# Altium PCB PD1_8.PcbDoc
Units mil, origin at the board's own origin, x right, y up, seen from the top; angles counter-clockwise.
Board outline 4000 x 4000 mil, 2 copper layers (Top Layer, Bottom Layer); 74 components, 40 nets, 286 pads, 58 vias.
Unrouted connection lines stored in the file: 2.
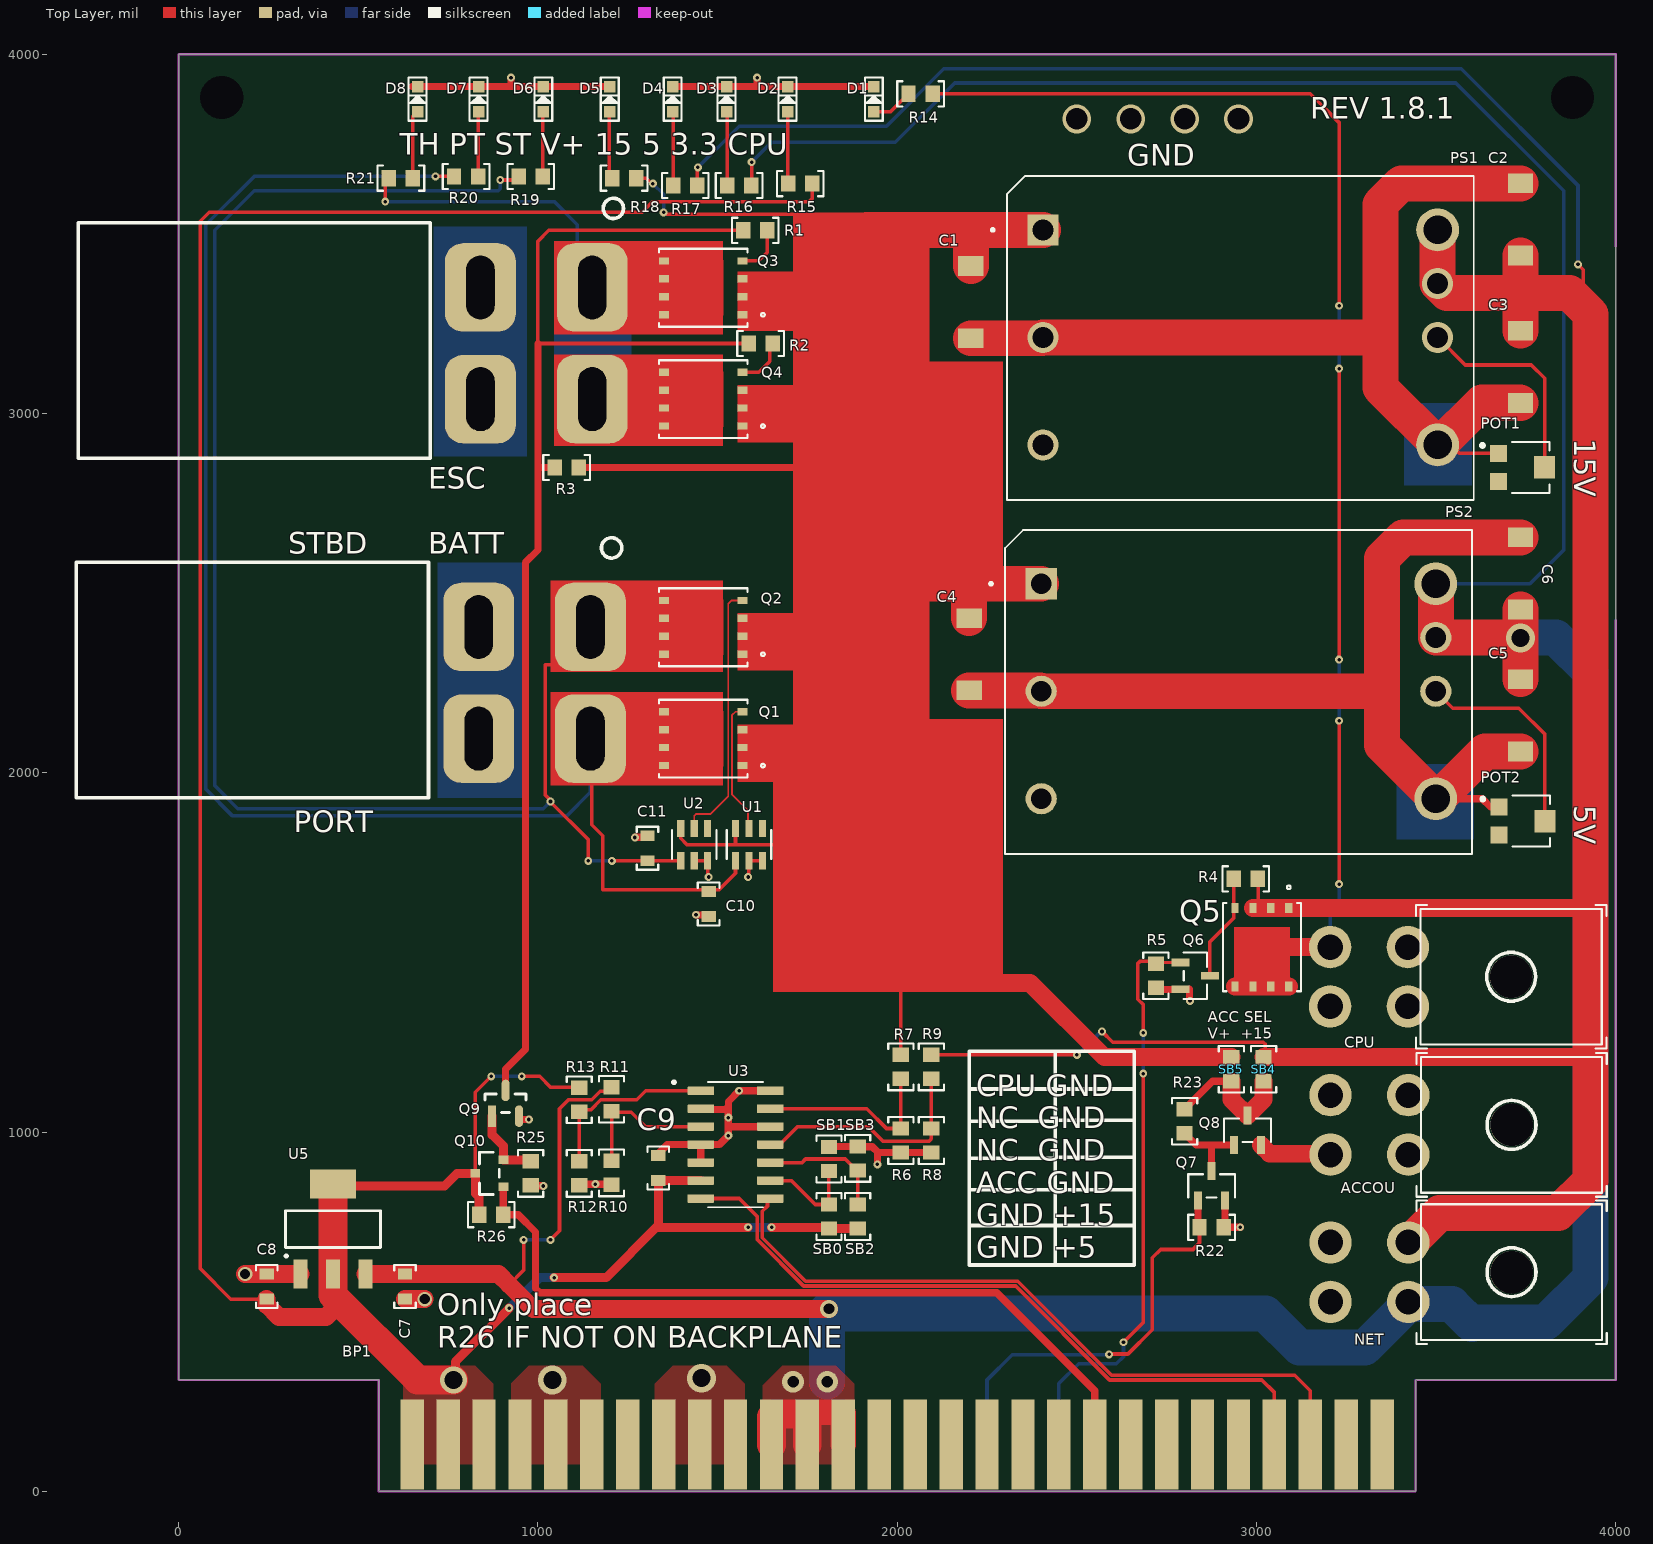
[diagram p0: Top Layer view]
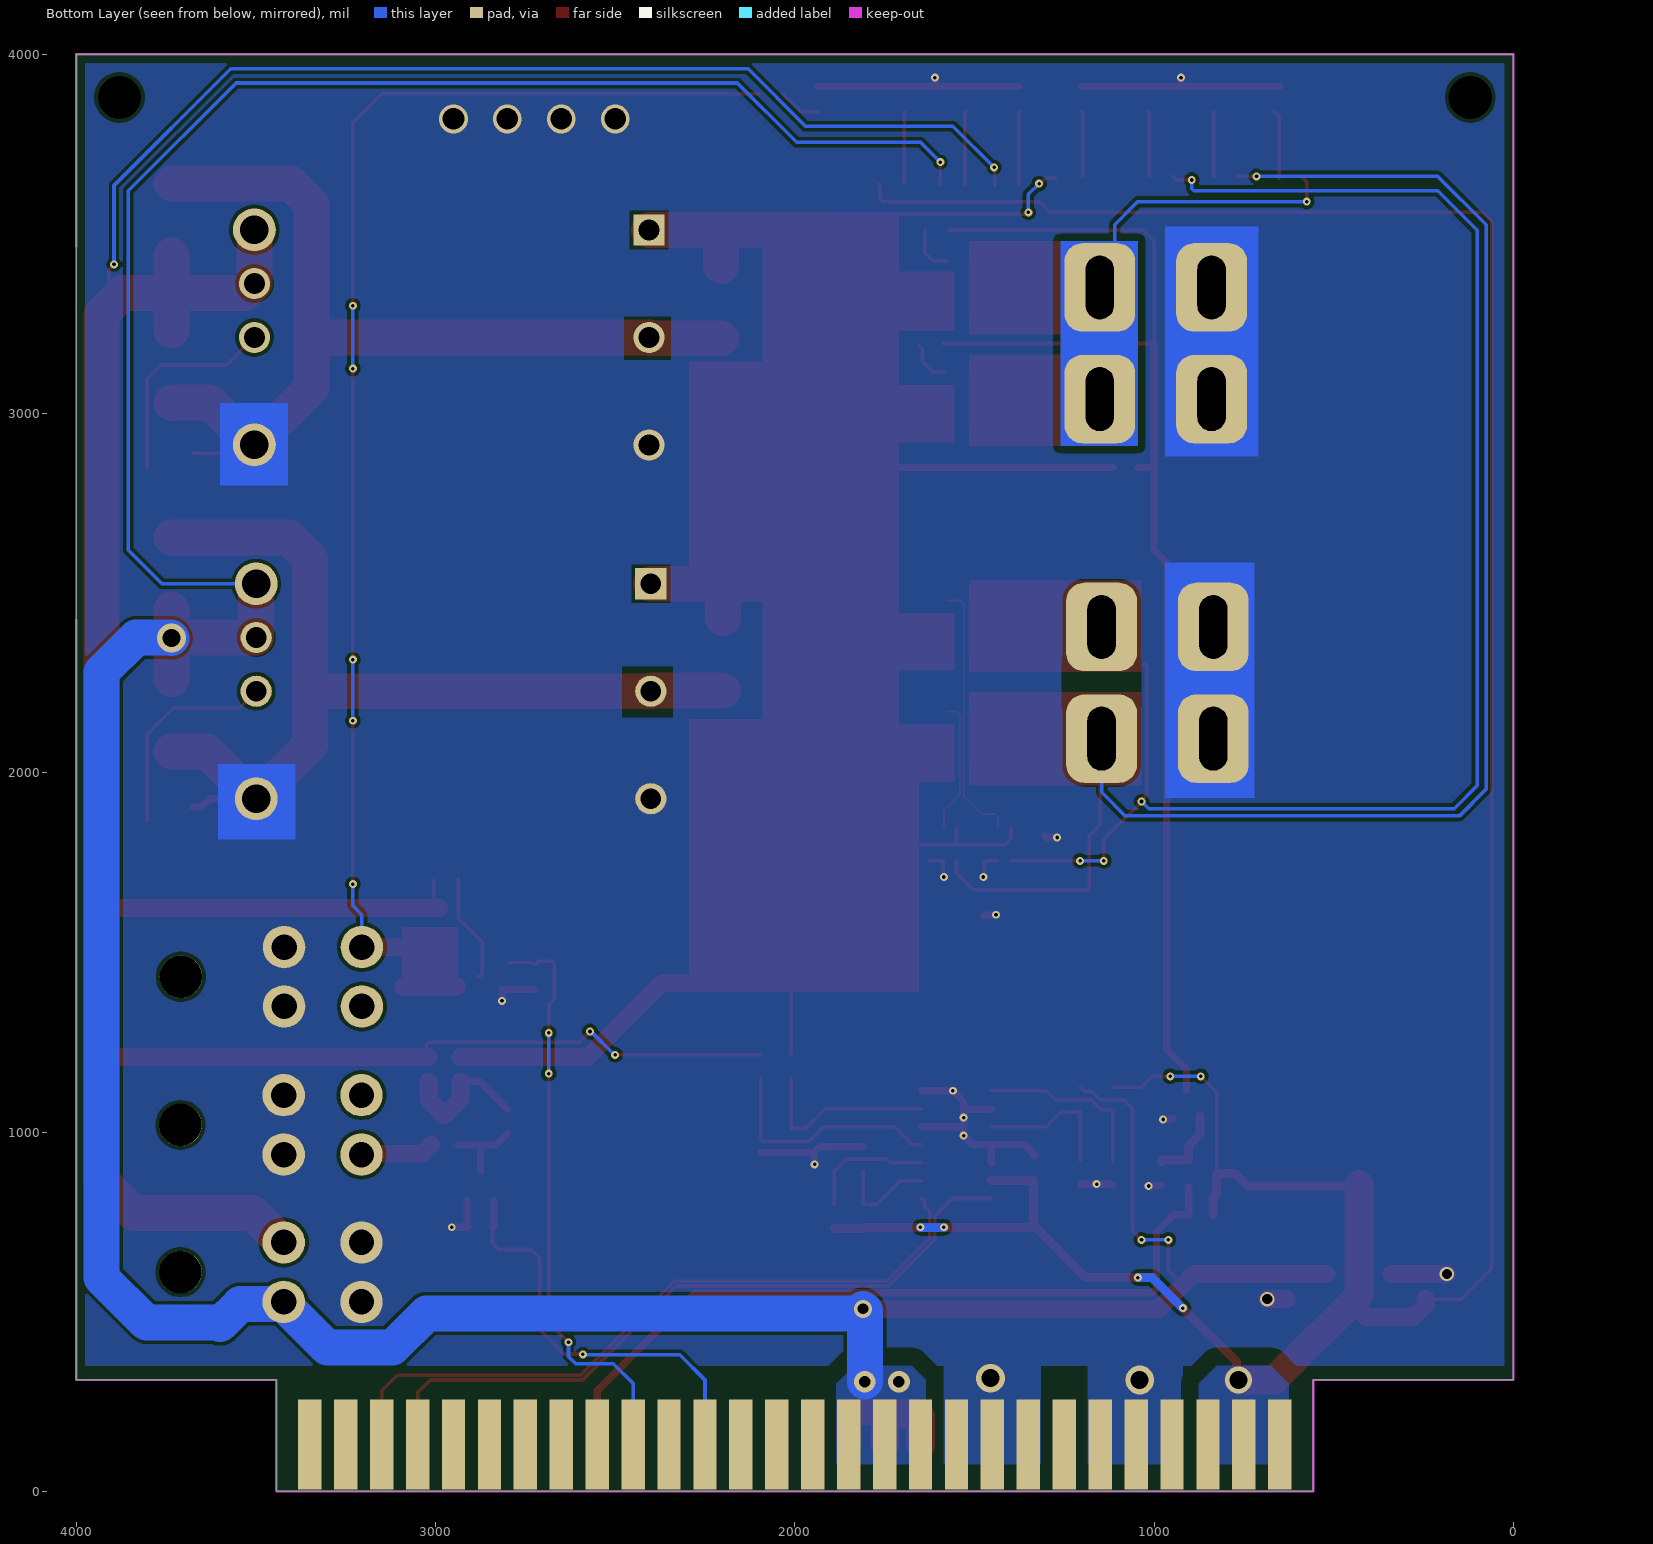
[diagram p1: Bottom Layer view, seen from below]
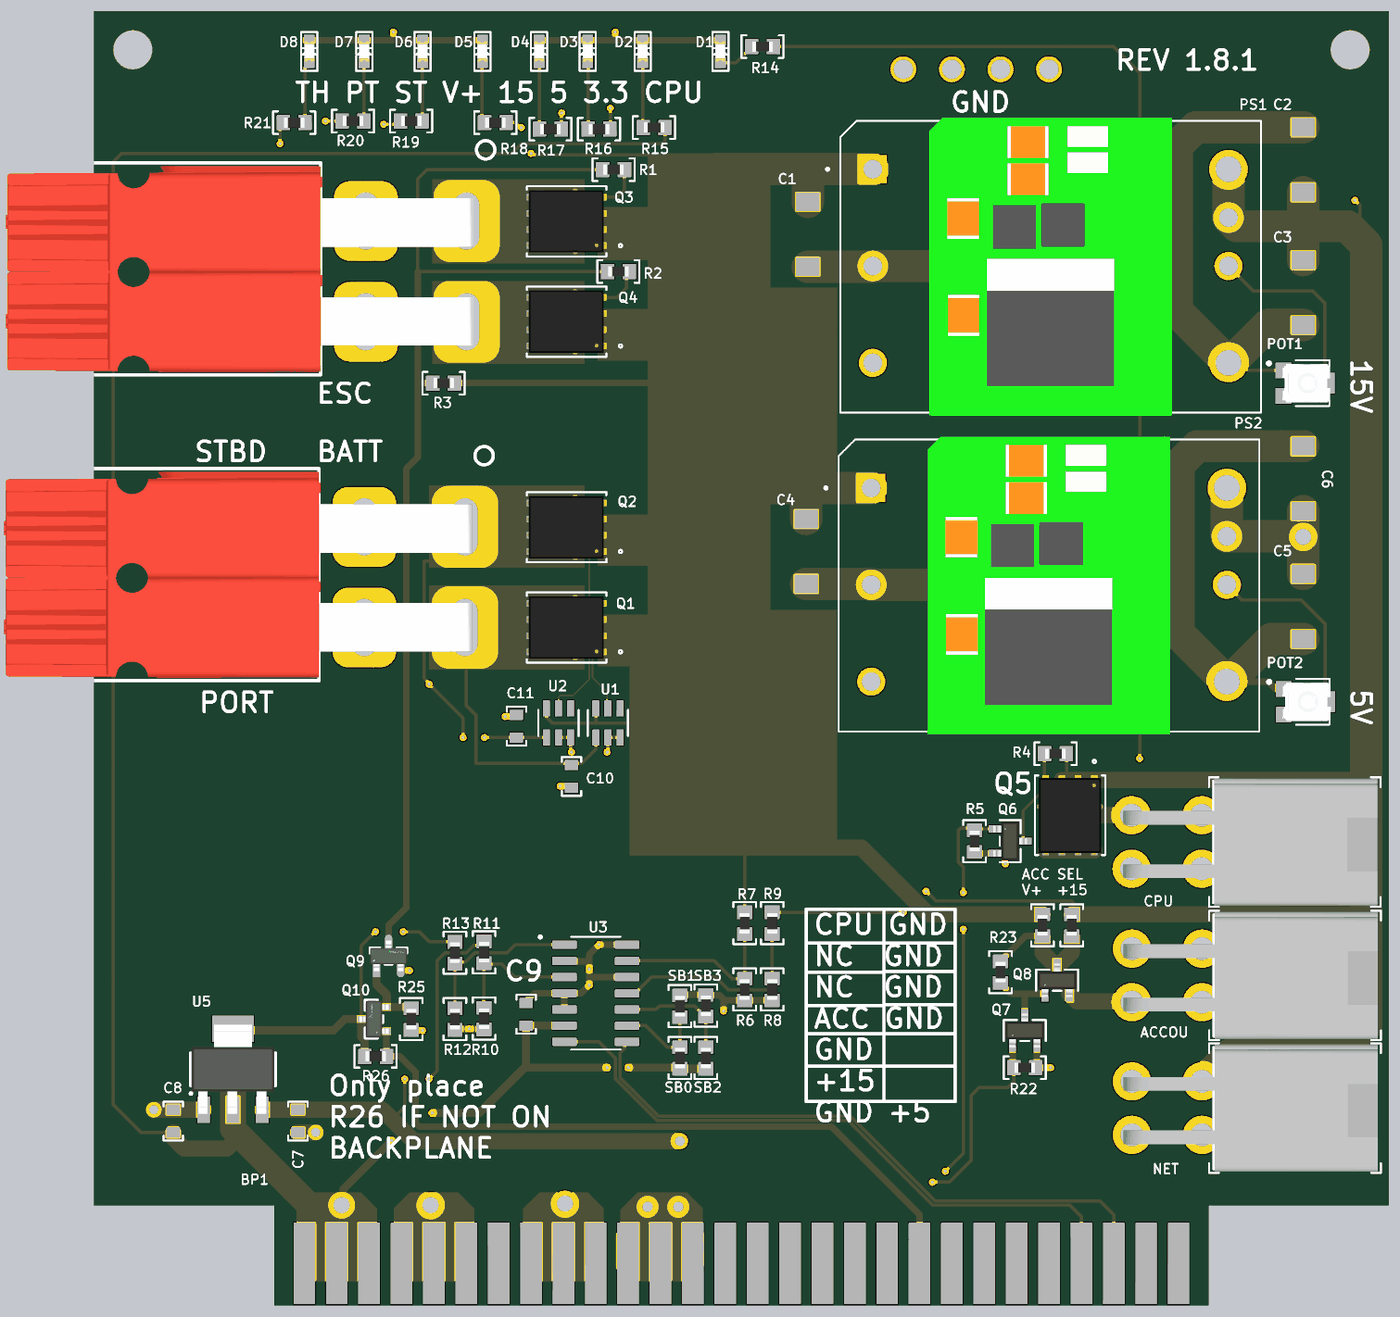
[diagram p2: 3D render of the assembled board from above, using the file's embedded part models]

## Layer stack, top to bottom
Top Solder: solder mask 0.4, Solder Resist, Dk 3.5
Top Layer: signal copper 2.7559
Dielectric 1: dielectric 12.6, FR-4, Dk 4.8
Bottom Layer: signal copper 2.7559
Bottom Solder: solder mask 0.4, Solder Resist, Dk 3.5

## Board outline
557,0 557,310 0,310 0,4000 4000,4000 4000,3465 4000,2425 4000,310 3443,310 3443,0

## Design rules (kind name [scope] priority, off if disabled: settings)
AcuteAngle [All] p1: minimum=8.75000000000000E+0001 checktracksonly=FALSE
BoardOutlineClearance [All] p1: gap=16 ignorepadtopadclearanceinfootprint=FALSE
Clearance [All] p1: gap=10 ignorepadtopadclearanceinfootprint=FALSE except(0: Arc-Region; 3.5: Arc-Arc Arc-Track Track-Track; 5: Arc-SMDPad Track-SMDPad SMDPad-SMDPad; 6: Arc-Text Track-Text SMDPad-THPad SMDPad-Via SMDPad-Text SMDPad-Hole THPad-Via THPad-Text THPad-Hole Via-Text Via-Hole Fill-Text Poly-Text Region-Text Text-Text Text-Hole; 12.99: Arc-THPad Track-THPad; 20: THPad-THPad Fill-Poly Fill-Region Poly-Region Region-Region; 50: Poly-Poly)
Clearance "Clearance Vplus" [InNet('GND') vs InNet('V+')] p2: gap=10 ignorepadtopadclearanceinfootprint=FALSE except(3.5: Arc-Arc Arc-Track Track-Track; 5: Arc-SMDPad Track-SMDPad SMDPad-SMDPad; 6: Arc-Text Track-Text SMDPad-THPad SMDPad-Via SMDPad-Text SMDPad-Hole THPad-Via THPad-Text THPad-Hole Via-Text Via-Hole Fill-Text Poly-Text Region-Text Text-Text Text-Hole; 12.99: Arc-THPad Track-THPad; 20: Arc-Fill Track-Fill SMDPad-Fill THPad-THPad THPad-Fill Via-Fill Fill-Fill; 50: Poly-Poly)
ComponentOrientations [All] p1: allowedrotations=32
DiffPairsRouting "USB 2.0" [InDifferentialPairClass('USB 2.0')] p1: maxlimit=4 minlimit=4 mostfreqgap=4 toplayer_minwidth=9 toplayer_maxwidth=9 toplayer_prefwidth=9 bottomlayer_minwidth=9 bottomlayer_maxwidth=9 bottomlayer_prefwidth=9 impedanceprofiledriven=TRUE maxuncoupledlength=500
DiffPairsRouting [All] p2: maxlimit=10 minlimit=10 mostfreqgap=10 toplayer_minwidth=15 toplayer_maxwidth=15 toplayer_prefwidth=15 bottomlayer_minwidth=15 bottomlayer_maxwidth=15 bottomlayer_prefwidth=15 maxuncoupledlength=500
FanoutControl Fanout_Default [All] p5: bgadir=Out bgaviamode=Centered fanoutstyle=Auto fanoutdirection=OutOnly viagrid=1 // Fanout_Default (Default Rule)
HoleSize "HoleSize JLCPCB" [All] p1: absolutevalues=TRUE maxlimit=245 minlimit=8 maxpercent=80.000 minpercent=20.000
HoleToHoleClearance "HoleToHoleClearance JLCPCB" [All] p1: gap=20 allowstackedmicrovias=TRUE
MinimumAnnularRing "MinimumAnnularRing JLCPCB" [All] p1: minimumring=6
MinimumSolderMaskSliver [All] p1 off: minsoldermaskwidth=10
PasteMaskExpansion [All] p1: expansion=1
PlaneClearance [InNet('GND')] p1: clearance=20
PolygonConnect EdgeConnect [(IsNamedPolygon('PolygonDirect'))] p1: connectstyle=Direct reliefconductorwidth=10 reliefentries=4 polygonreliefangle="90 Angle" airgapwidth=10
PolygonConnect [All] p2: thpad.connectstyle=Direct thpad.reliefconductorwidth=10 thpad.reliefentries=4 thpad.polygonreliefangle="90 Angle" thpad.airgapwidth=10 smdpad.connectstyle=Relief smdpad.reliefconductorwidth=10 smdpad.reliefentries=4 smdpad.polygonreliefangle="90 Angle" smdpad.airgapwidth=10 via.connectstyle=Direct via.reliefconductorwidth=10 via.reliefentries=4 via.polygonreliefangle="90 Angle" via.airgapwidth=10
RoutingVias "RoutingVias JLCPCB" [All] p1: holewidth=10 width=22 viastyle="Through Hole" minholewidth=8 minwidth=20 maxholewidth=28 maxwidth=40
SMDEntry [All] p1: side=TRUE corner=TRUE anyangle=TRUE
SMDToCorner [All] p1: distance=0
SMDToPlane [All] p1: distance=0
SilkToSilkClearance [All] p1: silktosilkclearance=1
SilkToSolderMaskClearance "SilkToSolderMaskClearance JLCPCB" [IsPad] p1: minsilkscreentomaskgap=6 clearancetoexposedcopper=TRUE
SolderMaskExpansion [All] p1: expansion=4 istentingtop=FALSE
UnRoutedNet [All] p1: checkbadconnections=TRUE
Width "Width JLCPCB 1oz" [All] p1: maxlimit=200 minlimit=5 preferedwidth=8 minimp=50.000000 maximp=50.000000 favimp=50.000000
20 further rules are at their usual default settings.

## Components (designator, comment, footprint, x,y, rotation, side; value= is the part's Value field where it differs from the comment)
ACCOU "4 POS R/A" "CONN_MOLEX_MINIFIT JR_4 POS_R/A" 3710,1020 r90 top
BATT "4 POS R/A" "CONN_ANDERSON_PP45_4 POS_R/A" 835,2406.02 r270 top
BP1 "Backplane Connector" BACKPLANE_EDGE_CONN 650,130 r0 top
C1 "100uF" CAPAE430X550N 2205,3310 r270 top
C2 ".1uF 50V" CAPAE430X550N 3735,3540.39 r90 top
C3 "22uF 50V" CAPAE430X550N 3735,3130 r270 top
C4 "100uF" CAPAE430X550N 2200,2330 r270 top
C5 ".1uF 50V" CAPAE430X550N 3735,2160 r270 top
C6 "22uF 50V" CAPAE430X550N 3735,2555 r90 top
C7 "10uF Ceramic 6.3V" CAPACITOR_0603 630,570 r270 top
C8 "47uF Ceramic 6.3V" CAPACITOR_0603 245,570 r90 top value=47uF
C9 "10uF Ceramic 6.3V" CAPACITOR_0603 1335,900 r90 top
C10 "10uF Ceramic 6.3V" CAPACITOR_0603 1475,1635 r270 top
C11 "10uF Ceramic 6.3V" CAPACITOR_0603 1305,1790 r90 top
CPU "4 POS R/A" "CONN_MOLEX_MINIFIT JR_4 POS_R/A" 3708.94,1432.32 r90 top
D1 "IN-S63AT5G" LED_0603 1935,3875 r90 top
D2 "IN-S63AT5G" LED_0603 1695,3875 r90 top
D3 "IN-S63AT5G" LED_0603 1525,3875 r90 top
D4 "IN-S63AT5G" LED_0603 1375,3875 r90 top
D5 "IN-S63AT5G" LED_0603 1200,3875 r90 top
D6 "IN-S63AT5G" LED_0603 1015,3875 r90 top
D7 "IN-S63AT5G" LED_0603 835,3875 r90 top
D8 "IN-S63AT5G" LED_0603 665,3875 r90 top
ESC "4 POS R/A" "CONN_ANDERSON_PP45_4 POS_R/A" 840,3351.02 r270 top
NET "4 POS R/A" "CONN_MOLEX_MINIFIT JR_4 POS_R/A" 3710,610 r90 top
POT1 "TC33X-2-203E" TRIM_TC33X-2-203E 3745,2850 r0 top
POT2 "TC33X-2-203E" TRIM_TC33X-2-203E 3745.87,1865.63 r0 top
PS1 "I6A4W020A033V-001-R" CONV_I6A4W020A033V-001-R 2955,3210 r0 top
PS2 "I6A4W020A033V-001-R" CONV_I6A4W020A033V-001-R 2950,2225 r0 top
Q1 "SIR167DP-T1-GE3" MOSFET_7DP-T1-GE3_VIS 1460,2095 r180 top
Q2 "SIR167DP-T1-GE3" MOSFET_7DP-T1-GE3_VIS 1460,2405 r180 top
Q3 "SIR167DP-T1-GE3" MOSFET_7DP-T1-GE3_VIS 1460,3350 r180 top
Q4 "SIR167DP-T1-GE3" MOSFET_7DP-T1-GE3_VIS 1460,3040 r180 top
Q5 "SIR167DP-T1-GE3" MOSFET_7DP-T1-GE3_VIS 3015,1515 r270 top
Q6 "PMV13XNEAR" SOT-23-3 2830,1435 r270 top
Q7 "MOSFET N-Ch 20V 7.3A TO-236AB" SOT-23-3 2875,850 r0 top
Q8 "MOSFET P-CHANNEL 20V 4.7A SOT23" SOT-23-3 2975,1005 r0 top
Q9 "BSS138" FP-318-08-IPC_B 910,1080 r90 top
Q10 "BSS84,215" FP-SOT23-MFG 865,885 r180 top
R1 "10k Ohm 5% 1/10W" RESISTOR_0603 1605,3510 r0 top
R2 "10k Ohm 5% 1/10W" RESISTOR_0603 1620,3195 r0 top
R3 "10k Ohm 5% 1/10W" RESISTOR_0603 1080,2850 r180 top
R4 "10k Ohm 5% 1/10W" RESISTOR_0603 2970,1705 r180 top
R5 "10k Ohm 5% 1/10W" RESISTOR_0603 2720,1435 r270 top
R6 "0 Ohm Jumper No Fit" RESISTOR_0603 2010,976.5 r270 top
R7 "0 Ohm Jumper No Fit" RESISTOR_0603 2010,1181.5 r90 top
R8 "0 Ohm Jumper No Fit" RESISTOR_0603 2095,976.5 r270 top
R9 "0 Ohm Jumper No Fit" RESISTOR_0603 2095,1181.5 r270 top
R10 "0 Ohm Jumper No Fit" RESISTOR_0603 1205,886.5 r270 top
R11 "0 Ohm Jumper No Fit" RESISTOR_0603 1205,1091.5 r90 top
R12 "0 Ohm Jumper No Fit" RESISTOR_0603 1115,885 r270 top
R13 "0 Ohm Jumper No Fit" RESISTOR_0603 1115,1090 r270 top
R14 "0 Ohm Jumper No Fit" RESISTOR_0603 2065,3890 r180 top
R15 "0 Ohm Jumper No Fit" RESISTOR_0603 1730,3640 r180 top
R16 "0 Ohm Jumper No Fit" RESISTOR_0603 1560,3635 r180 top
R17 "0 Ohm Jumper No Fit" RESISTOR_0603 1410,3635 r180 top
R18 "0 Ohm Jumper No Fit" RESISTOR_0603 1240,3655 r180 top
R19 "0 Ohm Jumper No Fit" RESISTOR_0603 980,3660 r0 top
R20 "0 Ohm Jumper No Fit" RESISTOR_0603 800,3660 r0 top
R21 "0 Ohm Jumper No Fit" RESISTOR_0603 618.5,3655 r0 top
R22 "10k Ohm 5% 1/10W" RESISTOR_0603 2875,735 r180 top
R23 "10k Ohm 5% 1/10W" RESISTOR_0603 2800,1030 r270 top
R25 "10k Ohm 5% 1/10W" RESISTOR_0603 980,885 r270 top
R26 "10k Ohm 5% 1/10W" RESISTOR_0603 870,770 r0 top
SB0 "0 Ohm Jumper No Fit" RESISTOR_0603 1810,765 r90 top
SB1 "0 Ohm Jumper No Fit" RESISTOR_0603 1810,925 r90 top
SB2 "0 Ohm Jumper No Fit" RESISTOR_0603 1890,765 r90 top
SB3 "0 Ohm Jumper No Fit" RESISTOR_0603 1890,926.5 r90 top
SB4 "0 Ohm Jumper No Fit" RESISTOR_0603 3020,1175 r270 top
SB5 "0 Ohm Jumper No Fit" RESISTOR_0603 2930,1175 r270 top
U1 "LTC4412ES6TRPBF" TSOT-23_S6 1587.4,1800 r90 top
U2 "LTC4412ES6TRPBF" TSOT-23_S6 1435,1800 r90 top
U3 "MCP3428-E/SL" SOIC127P600X175-14N 1550,965 r0 top
U5 "LM1117IMPX-3.3/NOPB" SOT-223-4 429.45,730 r90 top

## Footprints (in the part's own frame and the unit in brackets; to place one, negate y for a bottom-side part, rotate by r counter-clockwise, add the part's x,y. Pads: shape width x height; smd on the part's side, far side on the other; paste and mask are expansions set on the pad)
BACKPLANE_EDGE_CONN [mil]
  rect 65x250 smd far side: 1(0,0) 2(100,0) 3(200,0) 4(300,0) 5(400,0) 6(500,0) 7(600,0) 8(700,0) 9(800,0) 10(900,0) 11(1000,0) 12(1100,0) 13(1200,0) 14(1300,0) 15(1400,0) 16(1500,0) 17(1600,0) 18(1700,0) 19(1800,0) 20(1900,0) 21(2000,0) 22(2100,0) 23(2200,0) 24(2300,0) 25(2400,0) 26(2500,0) 27(2600,0) 28(2700,0)
  rect 65x250 smd: 29(2700,0) 30(2600,0) 31(2500,0) 32(2400,0) 33(2300,0) 34(2200,0) 35(2100,0) 36(2000,0) 37(1900,0) 38(1800,0) 39(1700,0) 40(1600,0) 41(1500,0) 42(1400,0) 43(1300,0) 44(1200,0) 45(1100,0) 46(1000,0) 47(900,0) 48(800,0) 49(700,0) 50(600,0) 51(500,0) 52(400,0) 53(300,0) 54(200,0) 55(100,0) 56(0,0)
CAPACITOR_0603 [mil] "CAPACITOR 0603"
  rect 30x40 smd: 1(-35,0) 2(35,0)
  silkscreen extent -60,-30 60,30, body extent -31,-16 31,16, height 31
CAPAE430X550N [mm]
  rect 1.4x1.8 smd: 1(-2.55,0) 2(2.55,0)
"CONN_ANDERSON_PP45_4 POS_R/A" [mm] "Anderson Powerpole45 2x2 Red/Black"
  rrect50% 6.25x5 hole 2 slot 4.5 at 0 deg: 1(0,7.9) 2(7.9,7.9) 3(0,0) 4(7.9,0)
  silkscreen extent -6.31,-28.45 12.07,10.12, body extent -4.32,-28.26 11.84,8.45, height 16.17
"CONN_MOLEX_MINIFIT JR_4 POS_R/A" [mm] "Molex Minifit Jr 5569 4 Pos R/A"
  round 3 hole 1.8: 1(2.1,7.3) 2(-2.1,7.3) 3(2.1,12.8) 4(-2.1,12.8)
  round 3 hole 3 unplated mask+0: ""(0,0)
  silkscreen extent -5.08,-6.73 5.08,6.73, body extent -5,-6.48 5,13.46, height 11.4
CONV_I6A4W020A033V-001-R [mm]
  rect 2.205x2.205 hole 1.47: 1(-13.95,7.65)
  round 2.205 hole 1.47: 2(-13.95,0.05) 3(-13.95,-7.55) 6(13.95,0.05) 7(13.95,3.85)
  round 3.03 hole 2.02: 4(13.95,-7.55) 8(13.95,7.65)
  silkscreen extent -17.6,-11.45 16.5,11.45, body extent -9.53,-11.68 9.53,11.68, height 9.65
FP-318-08-IPC_B [mm]
  rect 1.524x0.578 smd paste+0 mask+0: 1(-0.91,0.95)
  rrect100% 1.524x0.578 smd paste+0 mask+0: 2(-0.91,-0.95) 3(0.91,0)
  silkscreen extent -0.65,-1.45 0.65,1.45, body extent -1.92,-1.7 1.92,1.7, height 0.25
FP-SOT23-MFG [mm]
  rect 0.7x0.6 smd paste-1000 mask+0: 1(-1,0.95) 2(-1,-0.95) 3(1,0)
  silkscreen extent -0.7,-1.5 0.7,1.5, body extent -1.5,-1.65 1.5,1.65, height 0.25
LED_0603 [mil] "LED 0603"
  rect 32x32 smd: 1(-35,0) 2(35,0)
  silkscreen extent -60,-25 60,25, body extent -31,-16 32,16, height 28
MOSFET_7DP-T1-GE3_VIS [mil]
  rect 28x20 smd paste-10 mask+0: 1(-109.25,75) 2(-109.25,25) 3(-109.25,-25) 4(-109.25,-75) 5(109.25,-75) 6(109.25,-25) 7(109.25,25) 8(109.25,75)
  Top Layer region: 95.25,77 -55.75,77 -55.75,-77 95.25,-77 95.25,-85 123.25,-85 123.25,-65 95.25,-65 95.25,-35 123.25,-35 123.25,-15 95.25,-15 95.25,15 123.25,15 123.25,35 95.25,35 95.25,65 123.25,65 123.25,85 95.25,85
  Top Layer region: 0,-77 0,-77 0,-77 0,-77 0,-77 0,-77 0,-77 0,-77
  Top Layer region: 0,77 0,77 0,77 0,77 0,77 0,77 0,77 0,77
  silkscreen extent -171,-109 123,109, body extent -120,-101 122,101, height 41
RESISTOR_0603 [mil] "Resistor 0603"
  rect 40x45 smd: 1(-33.5,0) 2(33.5,0)
  silkscreen extent -65,-35 65,35, body extent -31,-16 32,16, height 16
SOIC127P600X175-14N [mm]
  rrect25% 1.9x0.6 smd: 1(-2.455,3.81) 2(-2.455,2.54) 3(-2.455,1.27) 4(-2.455,0) 5(-2.455,-1.27) 6(-2.455,-2.54) 7(-2.455,-3.81) 8(2.455,-3.81) 9(2.455,-2.54) 10(2.455,-1.27) 11(2.455,0) 12(2.455,1.27) 13(2.455,2.54) 14(2.455,3.81)
  silkscreen extent -4.45,-4.43 1.95,4.51
SOT-23-3 [mil]
  rect 22x50 smd paste+0 mask+4: 1(-37.5,-41) 2(37.5,-41) 3(0,41)
  silkscreen extent -65,-33 65,33, body extent -60,-52 60,52, height 44
SOT-223-4 [mm]
  rect 2.05x1 smd paste+0 mask+0.102: 1(-3.175,2.3) 2(-3.175,0) 3(-3.175,-2.3)
  rect 2.05x3.25 smd paste+0 mask+0.102: 4(3.175,0)
  silkscreen extent -1.96,-3.35 1.3,3.35, body extent -3.5,-3.25 3.5,3.25, height 1.68
TRIM_TC33X-2-203E [mm]
  rect 1.2x1.2 smd: 1(-1.8,1) 3(-1.8,-1)
  rect 1.5x1.6 smd: 2(1.45,0)
  silkscreen extent -3.07,-1.8 1.8,1.8, body extent -1.9,-1.5 1.9,1.5, height 1.1
TSOT-23_S6 [mil]
  rect 48x20 smd: 1(-45,37.4) 2(-45,0) 3(-45,-37.4) 4(45,-37.4) 5(45,0) 6(45,37.4)
  silkscreen extent -40,-62 40,62

## Part data
ACCOU CPU NET: library part "CONN_MOLEX_MINIFIT JR_4POS_R/A", "Molex Minifit Jr. 5569  / 4 Pos R/A Natural", Color=Natural, Current Per Pin=13A, Manufacturer=Molex, Supplier Part Number 1=WM13112-ND, ComponentLink1Description=Datasheet, ComponentLink1URL=https://www.molex.com/pdm_docs/sd/026013115_sd.pdf, Configuration="Right Angle", Created by="Flip B", Number of Positions=4, Pitch=4.2mm, Series="Minifit Jr 5569", Supplier 1=Digi-Key
BATT ESC: library part CONN_ANDERSON_2x2_R/A, "Anderson PP45 / 4 Pos R/A Red/Black", Color=Red/Black, Current Per Pin=45A, Manufacturer=Anderson, Supplier Part Number 1=2243-1337G1-ND, ComponentLink1Description=Datasheet, ComponentLink1URL=https://www.andersonpower.com/content/dam/app/ecommerce/product-pdfs/DS-PP1545.pdf, Configuration="Right Angle", Created by="Flip B", Number of Positions=4, Pitch=7.9mm, Series="PowerPole 45", Supplier 1=Digi-Key, Supplier 2=Digi-Key, Supplier 3=Digi-Key, Supplier 4=Digi-Key, Supplier Part Number 2=2243-1336G1-ND, Supplier Part Number 3=2243-1327-BK-ND, Supplier Part Number 4=A102007-ND
BP1: library part BACKPLANE_EDGE_CONN, "Titan Backplane Edge Connector"
C1 C2 C3 C4 C5 C6: library part 865250340002, "4.7ÂµF 16V Aluminum Electrolytic Capacitors Radial, Can - SMD 2000 Hrs @ 85Â°C", Package=None, Availability=Warning, Check_prices=https://www.snapeda.com/parts/865250340002/W%C3%BCrth%20Elektronik/view-part/5002976/?ref=eda, MF="Wurth Elektronik", MP=865250340002, Price=None, Purchase-URL=https://pricing.snapeda.com/search/part/865250340002/?ref=eda, SnapEDA_Link=https://www.snapeda.com/parts/865250340002/W%C3%BCrth%20Elektronik/view-part/5002976/?ref=snap
C7 C9 C10 C11: library part CAPACITOR_10uF_0603, "Cap 10uF 6.3V +/-20% / Ceramic 0603", Supplier Part Number 1=1276-1119-1-ND, Tolerance="+/- 20%", Value (uF)=10uF, Voltage=6.3V, ComponentLink1Description=Digikey, ComponentLink1URL=https://www.digikey.com/en/products/detail/samsung-electro-mechanics/CL10A106MQ8NNNC/3886777, Made By="Flip B", Supplier 1=Digi-Key
C8: library part CAPACITOR_47uF_0603, "Cap 47uF 6.3V +/-20% / Ceramic 0603", Supplier Part Number 1=490-13247-1-ND, Tolerance="+/- 20%", Voltage=6.3V, ComponentLink1Description=Datsheet, ComponentLink1URL=https://www.mouser.com/datasheet/2/212/KEM_C1002_X7R_SMD-1102033.pdf, Made By="Flip B", Supplier 1=Digi-Key
D1 D2 D3 D4 D5 D6 D7 D8: library part LED_Green_0603_3V, "LED Green Vf= 3V If = 0.005A / IN-S63AT5G", Color=Green, Forward Current=5mA, Forward Voltage=3V, Package=0603, Supplier Part Number 1=1830-1062-1-ND, ComponentLink1Description=Datasheet, ComponentLink1URL=https://www.we-online.de/katalog/datasheet/150060GS75000.pdf, Made By="Robert Pafford", Supplier 1=Digi-Key
POT1 POT2: "20 kOhms 0.1W, 1/10W J Lead Surface Mount Trimmer Potentiometer Cermet 1 Turn Top Adjustment", Package="1608 Bourns", Check_prices=https://www.snapeda.com/parts/TC33X-2-203E/Bourns/view-part/312812/?ref=eda, Digi-Key_Part_Number=TC33X-2-203ECT-ND, MF=Bourns, MP=TC33X-2-203E, Purchase-URL=https://pricing.snapeda.com/search/part/TC33X-2-203E/?ref=eda, SnapEDA_Link=https://www.snapeda.com/parts/TC33X-2-203E/Bourns/view-part/312812/?ref=snap
PS1 PS2: "Non-Isolated PoL Module DC DC Converter 1 Output 3.3 ~ 15V 20A 9V - 53V Input", Package="DIP-8 TDK-Lambda", Availability="In Stock", Check_prices=https://www.snapeda.com/parts/I6A4W020A033V-001-R/TDK-Lambda%20Americas%20Inc./view-part/1737324/?ref=eda, MF="TDK-Lambda Americas", MP=I6A4W020A033V-001-R, Price=None, Purchase-URL=https://pricing.snapeda.com/search/part/I6A4W020A033V-001-R/?ref=eda, SnapEDA_Link=https://www.snapeda.com/parts/I6A4W020A033V-001-R/TDK-Lambda%20Americas%20Inc./view-part/1737324/?ref=snap
Q1 Q2 Q3 Q4 Q5: "P-Channel 30 V 60A (Tc) 65.8W (Tc) Surface Mount PowerPAK® SO-8", Mfr_Name=Vishay, Copyright="Copyright (C) 2022 Ultra Librarian. All rights reserved.", Manufacturer_Part_Number=SIR167DP-T1-GE3, RefDes=RefDes, Type=DEV
Q6: "N-Channel 20 V 7.3A (Ta) 610mW (Ta), 8.3W (Tc) Surface Mount TO-236AB", Amp Rating="7.3 A", Package=SOT23-3L, Power Dissipation="610mW (Ta), 8.3W (Tc)", Supplier Part Number 1=771-PMV13XNEAR, Created by="Dylan T", FET Type=N-Channel, Manufacturer _Part_Number=PMV13XNEAR, Rds (on)="15mOhm @ 7.3A, 8V", SourceLibrary=ON_Semiconductor_2020-01-13, Supplier 1=Mouser, Vdss="20 V", Vendor="Nexperia USA Inc.", Vgs (Max)="+/- 12 V", Vgs (th)="1.3V @ 250uA"
Q7: library part PMV13XNEAR, "N-Channel 20 V 7.3A (Ta) 610mW (Ta), 8.3W (Tc) Surface Mount TO-236AB", Amp Rating="7.3 A", Package=SOT23-3L, Power Dissipation="610mW (Ta), 8.3W (Tc)", Supplier Part Number 1=771-PMV13XNEAR, Created by="Dylan T", FET Type=N-Channel, Manufacturer _Part_Number=PMV13XNEAR, Rds (on)="15mOhm @ 7.3A, 8V", SourceLibrary=ON_Semiconductor_2020-01-13, Supplier 1=Mouser, Vdss="20 V", Vendor="Nexperia USA Inc.", Vgs (Max)="+/- 12 V", Vgs (th)="1.3V @ 250uA"
Q8: library part TSM500P02CX, "P-Channel 20 V 4.7A (Tc) 1.56W (Tc) Surface Mount SOT-23", Amp Rating="4.7 A", Package="TO-236-3, SC-59, SOT-23-3", Power Dissipation="1.56W (Tc)", Supplier Part Number 1=TSM500P02CXRFGCT-ND, Created by="Robert Pafford", FET Type=P-Channel, Manufacturer_Part_Number=TSM500P02CX, Rds (on)="50mOhm @ 3A, 4.5V", Supplier 1=Digi-Key, Vdss="20 V", Vendor="Taiwan Semiconductor Corporation", Vgs (Max)=±10V, Vgs (th)="800mV @ 250µA"
Q9: library part CMP-07173-000101-1, "MOSFET N-CH 50V 220MA SOT-23", Case/Package=SOT-23, Continuous Drain Current (ID)=220mA, Drain to Source Breakdown Voltage=50V, Drain to Source Resistance=3.5R, Gate to Source Voltage (Vgs)=20V, Input Capacitance=27pF, Max Operating Temperature=150°C, Max Power Dissipation=360mW, Min Operating Temperature=-55°C, On-State Resistance=6R, Package Quantity=1, Threshold Voltage=1.3V, Contact Plating=Tin, Current Rating=220mA, Drain to Source Voltage (Vdss)=50V, Dual Supply Voltage=50V, Element Configuration=Single, Fall Time=9ns, Height=0.93mm, Lead Free="Lead Free", Length=2.92mm, Mount="Surface Mount", Nominal Vgs=1.3V, Number of Elements=1, Number of Pins=3, Packaging="Tape and Reel", Power Dissipation=360mW, Radiation Hardening=No, Rds On Max=3.5R, REACH SVHC="No SVHC", Rise Time=9ns, Termination=SMD/SMT, Turn-Off Delay Time=20ns, Turn-On Delay Time=2.5ns, Voltage Rating (DC)=50V, Weight=0.03g, Width=1.3mm
Q10: library part CMP-14409-000006-1, "MOSFET P-CH 50V 130MA SOT-23", Continuous Drain Current=-130mA, Drain to Source Breakdown Voltage=-50V, Drain to Source Resistance=6Ω, Gate To Source Voltage=20V, Input Capacitace At Vds="25pF @ -25V", Manufacturer="Nexperia USA Inc.", Max Junction Temp=+150°C, Package=SOT23, Power Dissipation=250mW, Temperature="-65°C to +150°C", Temperature Range Low=-65°C, Automotive=No, Category=Trans, ComponentLink2Description=Datasheet, ComponentLink2URL=https://assets.nexperia.com/documents/data-sheet/BSS84.pdf, Depletion Mode=False, Device Class L1="Discrete Semiconductors", Device Class L2=Transistors, Device Class L3=MOSFETs, Digikey Description="MOSFET P-CH 50V 130MA SOT-23", Drain To Source Voltage=-50V, Footprint Url=https://assets.nexperia.com/documents/outline-drawing/SOT23.pdf, Height=1.1mm, Ipc Land Pattern Name=SOT95P230X100-3, Lead Free=Yes, Manufacturer Part Number=BSS84,215, Number Of Channels=1, Number Of P Channels=1, Octopart=https://octopart.com/bss84%2C215-nexperia-78739375, RoHS=TRUE, Rthja Max=500K/W, Temperature Range High=+150°C, Threshold Vgs Max=-2V, Threshold Vgs Min=-0.8V, Turn Off Delay Time=7ns, Turn On Delay Time=3ns
R1 R2 R3 R4 R5 R22 R23 R25 R26: library part RESISTOR_10K_0603, "RES 10k OHM 5% 1/10W 0603", Digikey Part Numer=CR0603-JW-104ELFTR-ND, Supplier Part Number 1=2019-RK73B1JTTD103JCT-ND, Tolerance="+/- 5%", Value  (Ohms)=10K, ComponentLink1Description=Datasheet, ComponentLink1URL=https://www.bourns.com/docs/product-datasheets/CRxxxxx.pdf, Made By="Robert Pafford", Supplier=Digikey, Supplier 1=Digi-Key, Wattage=1/8W
R6 R8 R10 R12: library part JUMPER_0_0603, "0 Ohm Jumper No Fit for Solder Bridge", Value  (Ohms)=10k, ComponentLink1Description=Digikey, ComponentLink1URL=https://www.digikey.com/en/products/detail/koa-speer-electronics-inc/RK73B1JTTD101J/9844701, Made By="Robert Pafford"
R7: library part JUMPER_0_0603, "0 Ohm Jumper No Fit for Solder Bridge", Value  (Ohms)=55k, ComponentLink1Description=Digikey, ComponentLink1URL=https://www.digikey.com/en/products/detail/koa-speer-electronics-inc/RK73B1JTTD101J/9844701, Made By="Robert Pafford"
R9: library part JUMPER_0_0603, "0 Ohm Jumper No Fit for Solder Bridge", Value  (Ohms)=36k, ComponentLink1Description=Digikey, ComponentLink1URL=https://www.digikey.com/en/products/detail/koa-speer-electronics-inc/RK73B1JTTD101J/9844701, Made By="Robert Pafford"
R11: library part JUMPER_0_0603, "0 Ohm Jumper No Fit for Solder Bridge", Value  (Ohms)=5k, ComponentLink1Description=Digikey, ComponentLink1URL=https://www.digikey.com/en/products/detail/koa-speer-electronics-inc/RK73B1JTTD101J/9844701, Made By="Robert Pafford"
R13 SB0 SB1 SB2 SB3 SB4 SB5: library part JUMPER_0_0603, "0 Ohm Jumper No Fit for Solder Bridge", Value  (Ohms)=0, ComponentLink1Description=Digikey, ComponentLink1URL=https://www.digikey.com/en/products/detail/koa-speer-electronics-inc/RK73B1JTTD101J/9844701, Made By="Robert Pafford"
R14 R17: library part JUMPER_0_0603, "0 Ohm Jumper No Fit for Solder Bridge", Value  (Ohms)=2.2k, ComponentLink1Description=Digikey, ComponentLink1URL=https://www.digikey.com/en/products/detail/koa-speer-electronics-inc/RK73B1JTTD101J/9844701, Made By="Robert Pafford"
R15: library part JUMPER_0_0603, "0 Ohm Jumper No Fit for Solder Bridge", Value  (Ohms)=60, ComponentLink1Description=Digikey, ComponentLink1URL=https://www.digikey.com/en/products/detail/koa-speer-electronics-inc/RK73B1JTTD101J/9844701, Made By="Robert Pafford"
R16: library part JUMPER_0_0603, "0 Ohm Jumper No Fit for Solder Bridge", Value  (Ohms)=400, ComponentLink1Description=Digikey, ComponentLink1URL=https://www.digikey.com/en/products/detail/koa-speer-electronics-inc/RK73B1JTTD101J/9844701, Made By="Robert Pafford"
R18 R19 R20 R21: library part JUMPER_0_0603, "0 Ohm Jumper No Fit for Solder Bridge", Value  (Ohms)=3.6k, ComponentLink1Description=Digikey, ComponentLink1URL=https://www.digikey.com/en/products/detail/koa-speer-electronics-inc/RK73B1JTTD101J/9844701, Made By="Robert Pafford"
U1 U2: "OR Controller Source Selector Switch P-Channel 2:1 TSOT-23-6", Package="SOT-23-6 Analog Devices", Arrow_Europe-Purchase-URL=https://snapeda.com/shop?store=Arrow+Europe&id=4343773, Availability=Good, DigiKey-Purchase-URL=https://snapeda.com/shop?store=DigiKey&id=4343773, MF="Analog Devices", Mouser-Purchase-URL=https://snapeda.com/shop?store=Mouser&id=4343773, MP=LTC4412ES6#TRPBF, Price=None, SnapEDA_Link=https://www.snapeda.com/parts/LTC4412ES6%23TRPBF/Analog%20Devices/view-part/4343773/?ref=snap
U3: "16 Bit Analog to Digital Converter 4 Input 1 Sigma-Delta 14-SOIC", Package="SOIC-14 Microchip", Availability=Unavailable, MF=Microchip, MP=MCP3428-E/SL, Price=None, SnapEDA_Link=https://www.snapeda.com/parts/MCP3428-E/SL/Microchip/view-part/13249/?ref=snap
U5: "IC REG LIN 3.3V 800MA SOT223-4", Manufacturer="Texas Instruments", Package=SOT-223-4, PartNumber=LM1117IMP-3.3/NOPB, Supplier Part Number 1=LM1117IMPX-3.3/NOPBCT-ND, Amp Out=800mA, Created by="Dylan T", Supplier 1=Digi-Key, Vin (Max)=15V, Vout (Min/Fixed)=3.3V

## Free pads (board coordinates)
  round 60 hole 120: 1(120,3880) 1(3880,3880)

## Via types
v1: diameter 22, hole 10, Top Layer to Bottom Layer, 45 vias
v2: diameter 80, hole 60, Top Layer to Bottom Layer, 4 vias
v3: diameter 80, hole 50, Top Layer to Bottom Layer, 3 vias
v4: diameter 40, hole 28, Top Layer to Bottom Layer, 2 vias
v5: diameter 60, hole 32, Top Layer to Bottom Layer, 2 vias
v6: diameter 50, hole 30, Top Layer to Bottom Layer, 1 vias
v7: diameter 75, hole 50, Top Layer to Bottom Layer, 1 vias

## Nets (pads, with @x,y where several pads share a name; then routed paths per layer and width w, separated by ;. In a path a pad name is that pad's centre, name@x,y a point inside that pad or via, vN(x,y) a via of type N, cw(c..) or ccw(c..) an arc to the next point about the centre after c; other vN are vias at no path point)
3V3: BP1.1 BP1.2 BP1.3 BP1.54 BP1.55 BP1.56 C8.1 C9.1 Q10.3 R13.1 R15.1 R26.1 SB0.1 SB2.1 U3.6 U5.2 U5.4 | length 8558.5
  Top Layer w10: C8.1 145,535 60,620 60,1125 60,3535 85,3560 1290,3560 1320,3590 1755,3590 1763.5,3598.5 R15.1 ; Q10.3 825.63,1110.63 v1(870,1155) ; v1(955,1155) 1005,1155 1035,1125 1113.5,1125 R13.1
  Top Layer w25: U5.4 434.45,850 740,850 775,885 Q10.3 825.63,829.37 836.5,818.5 R26.1 ; v7(765,310) 770.53,315.53 770.53,360.53 v1(919.97,509.97) ; v1(1045,595) 1190,595 1330,735 ; U3.6 C9.1 1335,740 1330,735 ; v1(1585,735) 1330,735 ; v1(1650.5,735) 1806.5,735 SB0.1 SB2.1
  Top Layer w50: C8.1 245,519.29 279.29,485 410,485 450,525
  Top Layer w80: U5.4 U5.2 429.45,545.55 665,310 v7(765,310)
  Bottom Layer w10: v1(870,1155) v1(955,1155)
  Bottom Layer w25: v1(919.97,509.97) 1005,595 v1(1045,595) ; v1(1585,735) v1(1650.5,735)
+5: BP1.11 BP1.12 BP1.13 BP1.44 BP1.45 BP1.46 C5.1 C6.1 C7.1 NET.2 PS2.7 PS2.8 R11.2 R16.1 U5.3 | length 11486.8
  Top Layer w10: 920,575 960,615 v1(960,700) ; v1(1035,700) 1060,725 1060,1065 1085,1090 1150,1090 1173.36,1113.36 1193.36,1113.36 R11.2 ; R16.1 1595,3636.5 v1(1595,3700)
  Top Layer w50: U5.3 610,605 C7.1 890,605 920,575 987,508 v6(1810,508)
  Top Layer w70: BP1.45@1750,207.5 1750,217.5 1752.5,220 1847.5,220 1850,217.5 BP1.44
  Top Layer w80: BP1.46 1650,207.5 1657.5,215 1742.5,215 1750,207.5 BP1.45
  Top Layer w100: PS2.8 PS2.7 3733.43,2376.57 v3(3735,2375) ; C5.1 v3(3735,2375) ; C6.1 v3(3735,2375)
  Bottom Layer w10: v1(960,700) v1(1035,700) ; v1(1595,3700) 1650,3755 1995,3755 2160,3920 3555,3920 3855,3620 3855,2620 3761.18,2526.18 PS2.8
  Bottom Layer w100: v5(1805,305) 1805,503 v6(1810,508) ; v6@1805,495 3025,495 3120,400 3301.42,400 3413.54,512.12 3413.54,513.37 3421.36,521.18 3543.82,521.18 3600,465 3605,470 3805,470 3930,595 3930,2280 3833.43,2376.57 3736.57,2376.57 v3(3735,2375)
  other v5: 1710,305
+15: C2.1 C3.1 NET.1 PS1.7 PS1.8 Q5.1 Q5.2 Q5.3 R4.1 R9.1 R17.1 SB4.1 | length 9877.9
  Top Layer w10: R17.1 1443.5,3683.5 v1(1445,3685) ; R9.1 v1(2500,1215) v1@2505,1215 ; v1(2570.03,1280.03) 2600.05,1250 3019.14,1250 3025,1244.14 3025,1213.5 SB4.1 ; R4.1@3005,1701.31 3005,1630 3010.75,1624.25 Q5.2 ; 3871.42,3335 3904.14,3335 3910,3340.86 3910,3400 v1(3895,3415)
  Top Layer w50: Q5.3 Q5.2 Q5.1 3930,1624.25 ; SB4.1 3930,1208.5
  Top Layer w100: NET.1@3420,690 3424.9,690 3509.9,775 3840,775 3930,865 3930,1208.5 3930,1624.25 3930,3276.42 3871.42,3335 3735,3335 ; PS1.8 PS1.7 3530.79,3335 3735,3335 ; C3.1 3735,3335 ; C2.1 3735,3335
  Bottom Layer w10: v1(1445,3685) 1560,3800 1970,3800 2130,3960 3570,3960 3895,3635 v1(3895,3415) ; v1(2500,1215) 2502.5,1215 2567.53,1280.03 v1(2570.03,1280.03)
Accoustic_OnOff: BP1.17 Q7.1 R22.2 | length 1165.8
  Top Layer w10: v1(2590,381) 2591.3,382.3 2642.3,382.3 2710,450 2710,650 2733.25,673.25 2823.25,673.25 2841.5,691.5 R22.2
  Top Layer w20: Q7.1 2837.5,739 R22.2
  Bottom Layer w10: BP1.17 2250,310 2320,380 2589,380 v1(2590,381)
Accoustic_Pwr: ACCOU.4 Q8.2 | length 201.1
  Top Layer w50: Q8.2 3036.85,939.65 ACCOU.4@3203.46,939.65
BRD_SCL: BP1.31 U3.8 | length 1970.9
  Top Layer w10: U3.8 1645.86,815 1639.05,808.19 1639.05,794.05 1624.5,779.5 1624.5,705.5 1745,585 2335.25,585 2596.75,323.5 3106.5,323.5 3150,280 BP1.31
BRD_SDA: BP1.32 U3.7 | length 2002.9
  Top Layer w10: U3.7 1560,815 1611,764 1611,714 1611,699.91 1739.41,571.5 2329.66,571.5 2591.16,310 3015,310 3050,275 BP1.32
GND: ACCOU.1 ACCOU.2 BATT.3 BATT.4 BP1.4 BP1.5 BP1.6 BP1.8 BP1.9 BP1.10 BP1.47 BP1.48 BP1.49 BP1.51 BP1.52 BP1.53 C1.2 C2.2 C3.2 C4.2 C5.2 C6.2 C7.2 C8.2 C9.2 C10.2 C11.2 CPU.1 CPU.2 D1.2 D2.2 D3.2 D4.2 D5.2 D6.2 D7.2 D8.2 ESC.3 ESC.4 NET.3 NET.4 POT1.1 POT2.1 PS1.2 PS1.3 PS1.4 PS2.2 PS2.3 PS2.4 Q6.2 Q7.2 Q9.2 R5.2 R6.2 R8.2 R10.2 R12.2 R22.1 R25.2 SB1.2 SB3.2 U1.2 U1.3 U2.2 U2.3 U3.2 U3.4 U3.5 U3.12 U3.14 U5.1 | length 8540.1
  Top Layer w10: U2.2 U2.3 1472.4,1731 1472.7,1730.7 1472.7,1712.3 v1(1475,1710) ; v1(1585,1710) 1587.3,1712.3 1587.3,1730.89 1587.4,1731 U1.2 U1.3 ; PS1.4 3525.12,2891.84 3562.24,2891.84 3564.72,2889.37 POT1.1
  Top Layer w20: D8.2@650,3910 D8.2 D7.2 925,3910 ; v1(925,3935) 925,3910 ; Q9.2@947.4,1039.17 947.4,1036.66 948.67,1035.38 974.62,1035.38 v1(975,1035) ; R25.2 981.12,850.38 1014.62,850.38 v1(1015,850) ; R12.2 1118.5,855 v1(1160,855) 1203,855 R10.2 ; D5.2 D6.2 925,3910 ; v1(1270,1820) 1270.38,1820.38 1300.38,1820.38 C11.2 ; C9.2@1330,935 C9.2 1335,940 1360,965 U3.4 ; D4.2 D3.2 1610,3910 ; v1(1440,1605) 1440.38,1604.62 1470.38,1604.62 C10.2 ; U3.5@1451.54,913.19 U3.5 U3.4 ; U3.2 1455.16,1063.19 1530,1063.19 ; 1535,1015 U3.12 ; v1(1610,3935) 1610,3910 ; U3.14 v1(1560,1115) 1530.17,1085.17 1530.17,1073.05 1530,1072.87 1530,1063.19 ; SB1.2 1811.5,960 SB3.2 ; SB3.2@1892.5,960 1893.28,959.22 1930.78,959.22 1947,943 ; D1.2 D2.2 1610,3910 ; v1(1945,910) 1945.38,910.38 1945.38,941.38 1947,943 ; R8.2 R6.2 1947,943 ; R5.2@2725,1396.5 2725.5,1397 2813.5,1397 2814,1397.5 2814,1366.54 2815,1365.54 v1(2815,1365) ; Q7.2 2912.5,739 R22.1 v1(2955,735) ; PS2.4 3504.43,1927.76 3628.62,1927.76 3651.38,1905 POT2.1 ; U3.4 1505,965 v1(1530,990) v1(1530,1040) 1530,1063.19
  Top Layer w50: v4(185,605) C8.2 U5.1 ; C7.2 v4(685,535)
  Top Layer w100: C4.2 2398.15,2229.61 PS2.2 3346.97,2226.97 3345,2225 ; C1.2 2403.43,3209.61 PS1.2 3345,3211.97 ; PS2.4 3350,2076.97 3350,2596.82 3408.58,2655.39 C6.2 ; PS2.4@3504.43,1927.76 3636.28,2059.61 C5.2 ; C3.2 3734.07,3030.53 3627.21,3030.53 3509.43,2912.76 PS1.4 3345,3071.97 3345,3211.97 ; C2.2 3403.58,3640.79 3345,3582.21 3345,3211.97
  other v2: 2500,3820 2650,3820 2800.19,3820 2950,3820
  other v3: 1040,310 1455,315
Killswitch: BP1.37 Q10.1 R26.2 | length 2169.3
  Top Layer w20: Q10.1 903.5,846.73 R26.2 945,770 993.5,721.5 993.5,564.72 1005.22,553 2277,553 2550,280 BP1.37
Motor_Power: ESC.1 ESC.2 Q3.5 Q3.6 Q3.7 Q3.8 Q4.5 Q4.6 Q4.7 Q4.8 R21.1 | length 823.5
  Top Layer w10: v1(575,3590) 575,3645 R21.1
  Bottom Layer w10: v1(575,3590) 1045,3590 1109.52,3525.48 1109.52,3430.48 1151.02,3388.98 ESC.1 ESC.1@1150,3352.05
NetD1_1: D1.1 R14.2 | length 118.7
  Top Layer w10: D1.1 1981.5,3840 2014,3872.5 2016.5,3872.5 2031.5,3887.5 R14.2
NetD2_1: D2.1 R15.2 | length 200.6
  Top Layer w10: D2.1 1695,3641.5 R15.2
NetD3_1: D3.1 R16.2 | length 205.6
  Top Layer w10: D3.1 1526.5,3838.5 R16.2
NetD4_1: D4.1 R17.2 | length 205.6
  Top Layer w10: D4.1 1376.5,3838.5 R17.2
NetD5_1: D5.1 R18.2 | length 180.6
  Top Layer w10: R18.2@1198.5,3660 1198.5,3838.5 D5.1
NetD6_1: D6.1 R19.2 | length 180.6
  Top Layer w10: R19.2 1013.5,3838.5 D6.1
NetD7_1: D7.1 R20.2 | length 180.6
  Top Layer w10: R20.2 833.5,3838.5 D7.1
NetD8_1: D8.1 R21.2 | length 190.4
  Top Layer w10: R21.2 652,3827 D8.1
NetPOT1_2: POT1.2 PS1.6 | length 593
  Top Layer w10: PS1.6 3581.18,3135 3765,3135 3802.09,3097.91 POT1.2
NetPOT2_2: POT2.2 PS2.6 | length 594.8
  Top Layer w10: PS2.6 3546.18,2180 3730,2180 3802.95,2107.05 POT2.2
NetQ1_4: Q1.4 U1.5 | length 376.1
  Top Layer w5: Q1.4@1577.28,2170 1550,2170 1540,2160 1540,1940 1560,1920 1585,1895 1585,1847.4 U1.5
NetQ2_4: Q2.4 U2.5 | length 739.2
  Top Layer w5: U2.5 1435,1880 1440,1885 1480,1885 1530,1935 1530,2470 1540,2480 Q2.4@1577.28,2480
NetQ3_4: Q3.4 R1.2 | length 132.5
  Top Layer w10: Q3.4@1577.28,3425 1615,3425 1638.5,3448.5 R1.2
NetQ4_4: Q4.4 R2.2 | length 125.9
  Top Layer w10: Q4.4@1580,3115 1615,3115 1645,3145 1645,3181.5 R2.2@1653.5,3190
NetQ5_4: Q5.4 Q6.3 R4.2 | length 308.5
  Top Layer w10: Q6.3@2882,1432.5 2876,1432.5 2870,1438.5 2870,1529.25 2936.5,1595.75 R4.2
NetQ7_3: Q7.3 Q8.1 R23.2 | length 224
  Top Layer w20: R23.2 2832.5,964 2875,964 ; Q7.3 2875,964 ; Q8.1 2875,964
NetQ8_3: Q8.3 R23.1 SB4.2 SB5.2 | length 390.6
  Top Layer w20: R23.1 2878,1141.5 SB5.2
  Top Layer w50: SB5.2 2930,1091 Q8.3 3020,1091 SB4.2
NetQ9_1: Q9.1 Q10.2 R25.1 | length 212.2
  Top Layer w25: Q9.1 872.6,992.4 904.37,960.63 Q10.2 976.1,922.4 R25.1
NetQ9_3: Q9.3 R1.1 R2.1 R3.2 | length 3618.4
  Top Layer w10: R1.1 1030,3510 1000,3480 1000,3195 R2.1
  Top Layer w20: Q9.3 910,1175 965,1230 965,2585 1000,2620 1000,2850 ; 1000,3195 1000,2850 ; R3.2 1000,2850
NetR6_1: R6.1 R7.1 U3.13 | length 524.1
  Top Layer w10: U3.13 1915,1065 1970,1010 R6.1 R7.1
NetR8_1: R8.1 R9.2 U3.11 | length 655.2
  Top Layer w10: U3.11 1672.24,965 1722.24,1015 1920,1015 1960,975 2089.14,975 2095,980.86 R9.2
NetR10_1: R10.1 R11.1 U3.3 | length 404.2
  Top Layer w10: R10.1 R11.1 1208,1055 1260,1055 1300,1015 U3.3
NetR12_1: R12.1 R13.2 U3.1 | length 500.6
  Top Layer w10: R12.1 R13.2 1120.14,1061.64 1146.64,1061.64 1175,1090 1275,1090 1300,1115 U3.1
NetSB0_2: SB0.2 SB1.1 U3.9 | length 283.9
  Top Layer w10: U3.9 1705,865 1771.5,798.5 SB0.2 SB1.1
NetSB2_2: SB2.2 SB3.1 U3.10 | length 355.2
  Top Layer w10: U3.10 1735,915 1745,925 1855.5,925 1887.5,893 SB3.1 SB2.2
PORT_BATT: BATT.2 C10.1 Q1.5 Q1.6 Q1.7 Q1.8 R20.1 U1.1 | length 4532.7
  Top Layer w10: v1(715,3660) R20.1 ; 1275,2095 1198.21,2018.21 1187.87,2018.21 1150,1980.33 1150,1855 1180,1825 1180,1675 1505,1675 1550,1720 U1.1 ; 1470,2095 1470,2075.32 1472.4,2072.91
  Bottom Layer w10: v1(715,3660) 210,3660 75.09,3525.09 75.09,1954.91 150,1880 1080,1880 1146.02,1946.02 BATT.2
STBD_BATT: BATT.1 C11.1 Q2.5 Q2.6 Q2.7 Q2.8 R19.1 U2.1 | length 4448.4
  Top Layer w10: v1(895,3650) 936.5,3650 R19.1 ; v1@1034.62,1919.62 1140,1814.23 v1(1140,1755) ; v1(1035,1920) 1035,1923.25 1020,1938.25 1020,2300.4 1049.6,2300.4 ; BATT.1@1055.96,2315.29 1146.02,2405.34 BATT.1 ; v1(1206,1755) U2.1
  Bottom Layer w10: v1(895,3650) 895,3625.86 889.14,3620 210,3620 100,3510 100,1964.44 164.44,1900 1015,1900 v1(1035,1920) ; v1(1140,1755) v1(1206,1755)
V+: C1.1 C4.1 PS1.1 PS2.1 Q1.1 Q1.2 Q1.3 Q2.1 Q2.2 Q2.3 Q3.1 Q3.2 Q3.3 Q4.1 Q4.2 Q4.3 R3.1 R7.2 R18.1 SB5.1 U1.6 U2.6 | length 4130.1
  Top Layer w10: R18.1 1301.75,3655 1316.75,3640 v1(1320,3640) ; v1(1350,3560) 1353.25,3560 1358.25,3555 1735,3555 ; U2.6 1397.6,1817.4 1415,1800 1550,1800 ; U1.6 1550,1800 ; 1755,1800 1550,1800 ; R7.2 2010,1415 2015,1420
  Top Layer w20: R3.1 1820,2850
  Top Layer w50: 2245,1440 2270,1415 2370,1415 2576.5,1208.5 SB5.1
  Top Layer w100: 1910,3505 1916.18,3511.18 2205,3511.18 ; 2005.44,2554.56 2033.82,2526.18 2195,2526.18 ; 2167.5,1770 2167.5,1517.5 2245,1440 ; C4.1 2200,2521.18 2195,2526.18 ; C1.1 2205,3511.18 ; PS2.1 2195,2526.18 ; PS1.1 2205,3511.18
  Bottom Layer w10: v1(1320,3640) 1350,3610 v1(1350,3560)
Xavier_OnOff: BP1.19 Q6.1 R5.1 | length 1641
  Top Layer w8: R5.1@2725,1468.5 2729,1472.5 Q6.1 Q6.1@2800,1472.5
  Top Layer w10: v1(2630,415) 2685,470 v1(2685,1162.5) ; v1(2685,1276) 2685,1355 2670,1370 2670,1469.14 2675.86,1475 2713.5,1475 R5.1 R5.1@2725,1468.5
  Bottom Layer w10: BP1.19 2450,300 2505,355 2610,355 2630,375 v1(2630,415) ; v1(2685,1162.5) v1(2685,1276)
XavierCONN: CPU.3 Q5.5 Q5.6 Q5.7 Q5.8 R14.1 | length 3821.2
  Top Layer w10: R14.1 3150,3890 3230,3810 v1(3230,3300) ; v1(3230,1690) v1(3230,2145) ; v1(3230,2315) v1(3230,3125)
  Top Layer w50: Q5.5 Q5.6 Q5.7 Q5.8 ; 3010,1500 3025,1515 CPU.3
  Bottom Layer w10: CPU.3 3205,1605 3230,1630 v1(3230,1690) ; v1(3230,2145) v1(3230,2315) ; v1(3230,3125) v1(3230,3300)
pads on no net: ACCOU. ACCOU.3 BP1.7 BP1.14 BP1.15 BP1.16 BP1.18 BP1.20 BP1.21 BP1.22 BP1.23 BP1.24 BP1.25 BP1.26 BP1.27 BP1.28 BP1.29 BP1.30 BP1.33 BP1.34 BP1.35 BP1.36 BP1.38 BP1.39 BP1.40 BP1.41 BP1.42 BP1.43 BP1.50 CPU. CPU.4 NET. POT1.3 POT2.3 U1.4 U2.4

## Polygon pours and split planes (outlines as drawn)
GND on Bottom Layer "GND_L02_P048" (solid, pour order 48): 25,3975 3975,3975 3975,350 25,350
GND on Bottom Layer "PolygonDirect" (solid, pour order 6): 920,75 920,365 1185,365 1185,75
3V3 on Bottom Layer "PolygonDirect" (solid, pour order 4): 625,75 625,300 675,350 825,350 875,300 875,75
+5 on Bottom Layer "PolygonDirect" (solid, pour order 35): 1615,75 1615,290 1675,350 1835,350 1885,300 1885,75
GND on Bottom Layer "PolygonDirect" (solid, pour order 22): 1315,75 1315,365 1585,365 1585,75
GND on Top Layer "PolygonDirect" (solid, pour order 2): 925,75 925,300 975,350 1125,350 1175,300 1175,75
GND on Top Layer "PolygonDirect" (solid, pour order 5): 1325,75 1325,300 1375,350 1525,350 1575,300 1575,75
3V3 on Top Layer "PolygonDirect" (solid, pour order 1): 625,75 625,300 675,350 825,350 875,300 875,75
+5 on Top Layer "PolygonDirect" (solid, pour order 7): 1615,75 1615,285 1680,350 1830,350 1880,300 1880,75

## Keep-outs
Keep-Out Layer:
  lines w6: 4000,2425 4000,310 3443,310 3443,0 557,0 557,310 0,310 0,4000 4000,4000 4000,3465

## Other copper
Top Layer:
  rectangle net V+: 1555,2920 1760,3080
  rectangle net V+: 1655,1390 1725,1985
  rectangle net V+: 2075,2550 2295,3145
  rectangle net V+: 2040,1390 2295,2150
  rectangle net V+: 1555,1975 1775,2135
  rectangle net V+: 1555,2285 1795,2445
  rectangle net V+: 1555,3230 1745,3395
  rectangle net V+: 1710,1390 2090,3560
  rectangle net Motor_Power: 1045,2910 1515,3165
  rectangle net Motor_Power: 1045,3220 1515,3480
  rectangle net PORT_BATT: 1035,1965 1515,2225
  rectangle net STBD_BATT: 1035,2280 1515,2535
Bottom Layer:
  rectangle net GND: 710,2880 970,3520
  rectangle net GND: 720,1930 970,2585
  rectangle net Motor_Power: 1045,2910 1260,3480
  rectangle net GND: 3390,1815 3605,2025
  rectangle net GND: 3410,2800 3600,3030
  pour cut-out: 2475,3270 2345,3270 2345,3150 2475,3150
  pour cut-out: 2340,2295 2340,2155 2480,2155 2480,2295
  pour cut-out: 1035.5,2320.01 1035.5,2181.01 1256.55,2181.01 1256.55,2320.01

## Silkscreen, mask and mechanical layers (free items; w line width, h text height)
Top Overlay:
  lines w10: 2200,630 2440,630 2440,740 ; 2200,630 2200,740 2440,740 ; 2200,630 2660,630 2660,1225 ; 2200,630 2200,1225 2660,1225 ; 2440,740 2660,740 2660,840 2440,840 ; 2440,740 2440,840 ; 2440,840 2200,840 2200,927.5 2440,927.5 2440,840 ; 2440,1120 2660,1120 2660,1225 ; 2440,1120 2440,1225 2660,1225 ; 2440,1120 2200,1120 2200,1030 2440,1030 2440,1120 ; 2440,930 2660,930 2660,1032.5 2440,1032.5 2440,930
  text "REV 1.8.1" at 3150,3820 h60
  text "TH PT ST V+ 15 5 3.3 CPU" at 615,3720 h60
  text "GND" at 2640,3690 h60
  text "15V" at 3885,2930 h60 r270
  text "STBD" at 305,2610 h60
  text "5V" at 3885,1910 h60 r270
  text "PORT" at 320,1835 h60
  text "ACC SEL / V+  +15" at 2865,1260 h30
  text "CPU GND / NC  GND / NC  GND / ACC GND / GND +15 / GND +5" at 2220,650 h60
  text "Only place / R26 IF NOT ON BACKPLANE" at 720,400 h60